# EAGLE board pinout_overview (EAGLE 6.6.0)

Size 101.6 x 71.12 mm. Coordinates in mm from the lower left corner, seen from the top.
Outline: 0,0 101.6,0 101.6,71.12 0,71.12 0,0
Copper layers (1*16): Top 0.035mm / dielectric 1.5mm / Bottom 0.035mm
Design rules "default": minimum track width 10mil, minimum drill 24mil, track to track 8mil, track to pad 8mil, pad to pad 8mil, via to via 8mil, smd to smd 8mil, copper to edge 40mil, drill to drill 8mil, minimum pad ring 10mil, minimum via ring 8mil, stop-mask expansion 4mil, vias tented up to drill 0mil, thermal gap 10mil

## Footprints (pad centres in the part's own frame; a part is rotated, then mirrored left to right if it is on the bottom)
ESP01 = drill 0.8: CH_PD -1.285,-8.178; GPIO0 1.255,-5.638; GPIO2 -1.285,-5.638; RST 1.255,-8.178; TX -3.825,-8.178; VCC 3.795,-8.178 | drill 0.8 square: GND -3.825,-5.638; RX 3.795,-5.638
ESP02 = drill 0.8 square: GND -7,2.92; RST 7.21,2.92 | drill 0.8: GPIO0 7.21,-2.16; GPIO2 7.21,0.38; GPIO15/POWERDOWN 7.21,-4.7; RX -7,0.38; TX -7,-2.16; VCC -7,-4.7
ESP-03 = smd 1.5 x 1: ANT 7.4,4.8; CH_PD 7.4,2.8; GND 7.4,-7.2; GPIO0 -5.2,-7.2; GPIO2 -5.2,-5.2; GPIO12 -5.2,0.8; GPIO13 -5.2,-1.2; GPIO14 -5.2,2.8; GPIO15 -5.2,-3.2; GPIO18 7.4,0.8; NC 7.4,-5.2; URXD 7.4,-1.2; UTXD 7.4,-3.2; VCC -5.2,4.8
ESP05-4PIN = drill 0.8 square: GND -3.81,-5.715 | drill 0.8: RX -1.27,-5.715; TX 1.27,-5.715; VCC 3.81,-5.715
ESP05-5PIN = drill 0.8: GND -2.555,-5.73; RST -5.095,-5.73; RX -0.015,-5.73; TX 2.525,-5.73; VCC 5.074,-5.73
ESP10 = drill 0.8 square: GND 8,-3.9; RESET 8,3.9; RX 8,-2; TX 8,0; VCC 8,1.9
ESP-11 = smd 3.81 x 0.635: P$1 10.113,-4.445; P$2 10.113,-3.175; P$3 10.113,-1.905; P$4 10.113,-0.635; P$5 10.113,0.635; P$6 10.113,1.905; P$7 10.113,3.175; P$8 10.113,4.445
ESP12 = drill 0.7 offset: ADC -7.1,3.8; CH_PD -7.1,1.8; GND 6.9,-8.2; GPIO0 6.9,-2.2; GPIO2 6.9,-4.2; GPIO4 6.9,1.8; GPIO5 6.9,-0.2; GPIO12 -7.1,-4.2; GPIO13 -7.1,-6.2; GPIO14 -7.1,-2.2; GPIO15 6.9,-6.2; GPIO16 -7.1,-0.2; RESET -7.1,5.8; RX 6.9,3.8; TX 6.9,5.8; VCC -7.1,-8.2
ESP07 = smd 2.5 x 1: ANT 8.2,6.8; CH_PD 8.2,4.8; GND 8.2,-5.2; GPIO0 -8.2,-5.2; GPIO2 -8.2,-3.2; GPIO12 -8.2,2.8; GPIO13 -8.2,0.8; GPIO14 -8.2,4.8; GPIO15 -8.2,-1.2; GPIO16 8.2,2.8; NC 8.2,-3.2; RX 8.2,0.8; TX 8.2,-1.2; VCC -8.2,6.8
ESP09 = smd 2.4 x 1: ANT -5.1,2; CH_PD -5.1,-2; GPIO0 5,2; GPIO02 5,0; GPIO15 5,-2; VCC -5.1,0 | smd 2.4 x 2.4: GND -4.5,4.5; GND1 -4.5,-4.5; GND2 4.5,-4.5; GND3 4.6,4.5 | smd 1.7 x 1.7: GND4 1.2,1.3; GND5 -1.2,1.3; GND6 -1.2,-1.2; GND7 1.2,-1.2 | smd 1 x 2.4: GPIO12 0,-4.8; GPIO13 2,-4.8; GPIO14 -2,-4.8; RESET -2,5; RX 2,5; TX 0,5

## Placement (x,y rotation side)
E$1  [ESP01]  17.78,60.96 90 top
E$2  [ESP02]  48.26,60.33 0 top
E$3  [ESP-03]  80.01,59.69 0 top
E$4  [ESP05-4PIN]  10.16,43.82 90 top
E$5  [ESP05-5PIN]  27.3,43.82 90 top
E$6  [ESP10]  10.16,28.58 0 top
E$7  [ESP-11]  12.7,13.97 0 top
E$8  [ESP12]  83.82,28.58 0 top
E$9  [ESP07]  50.16,10.16 0 top
E$10  [ESP09]  52.07,38.1 0 top

## Library data of the parts
E$1-E$10 = esp8266modules

## Text on the board
Top: RXD | VCC | VCC | VCC | WIFI_ANT | GPIO0 | RST | GPIO14 | RST | RXD | CH_PD | GPIO12 | GPIO2 | GPIO2 | GPIO16 | CH_PD | TXD | GPIO13 | GND | 2 | GPIO0 | RXD | TXD | GND | GPIO15 | 3/4 | TXD | 1 | GPIO15 | GPIO2 | NC | GPIO0 | GND | VCC_3v3 | VCC_3v3 | TXD | TXD | RXD | GND | GPIO16 | TXD | RXD | GND | RXD | GND | GND | WIF_ANT | GND | RST | VCC_3V3 | GPIO0 | 5 | 5 | GPIO2 | CH_PD | GPIO15 | RST | TXD | ADC | RST | GPIO14 | GPIO12 | GPIO13 | RXD | GND | CH_PD | VCC_3V3 | GPIO4 | GND | GPIO16 | TXD | GPIO5 | GPIO14 | RXD | 6/9 | 12 | GPIO0 | 10 | GPIO12 | GND | GPIO13 | GPIO2 | VCC | GPIO15 | GND | GND | CH_EN | VCC | WIFI_ANT | RST | GPIO14 | RXD | CH_PD | TXD | GPIO12 | GPIO0 | GPIO13 | GPIO16 | GPIO1 | GPIO15 | RXD | 11 | VCC | 7/8 | GPIO2 | TXD | GPIO0 | NC | GND | ESP8266